# EAGLE board plugV6-Relay-NC-2 (EAGLE 7.5.0)
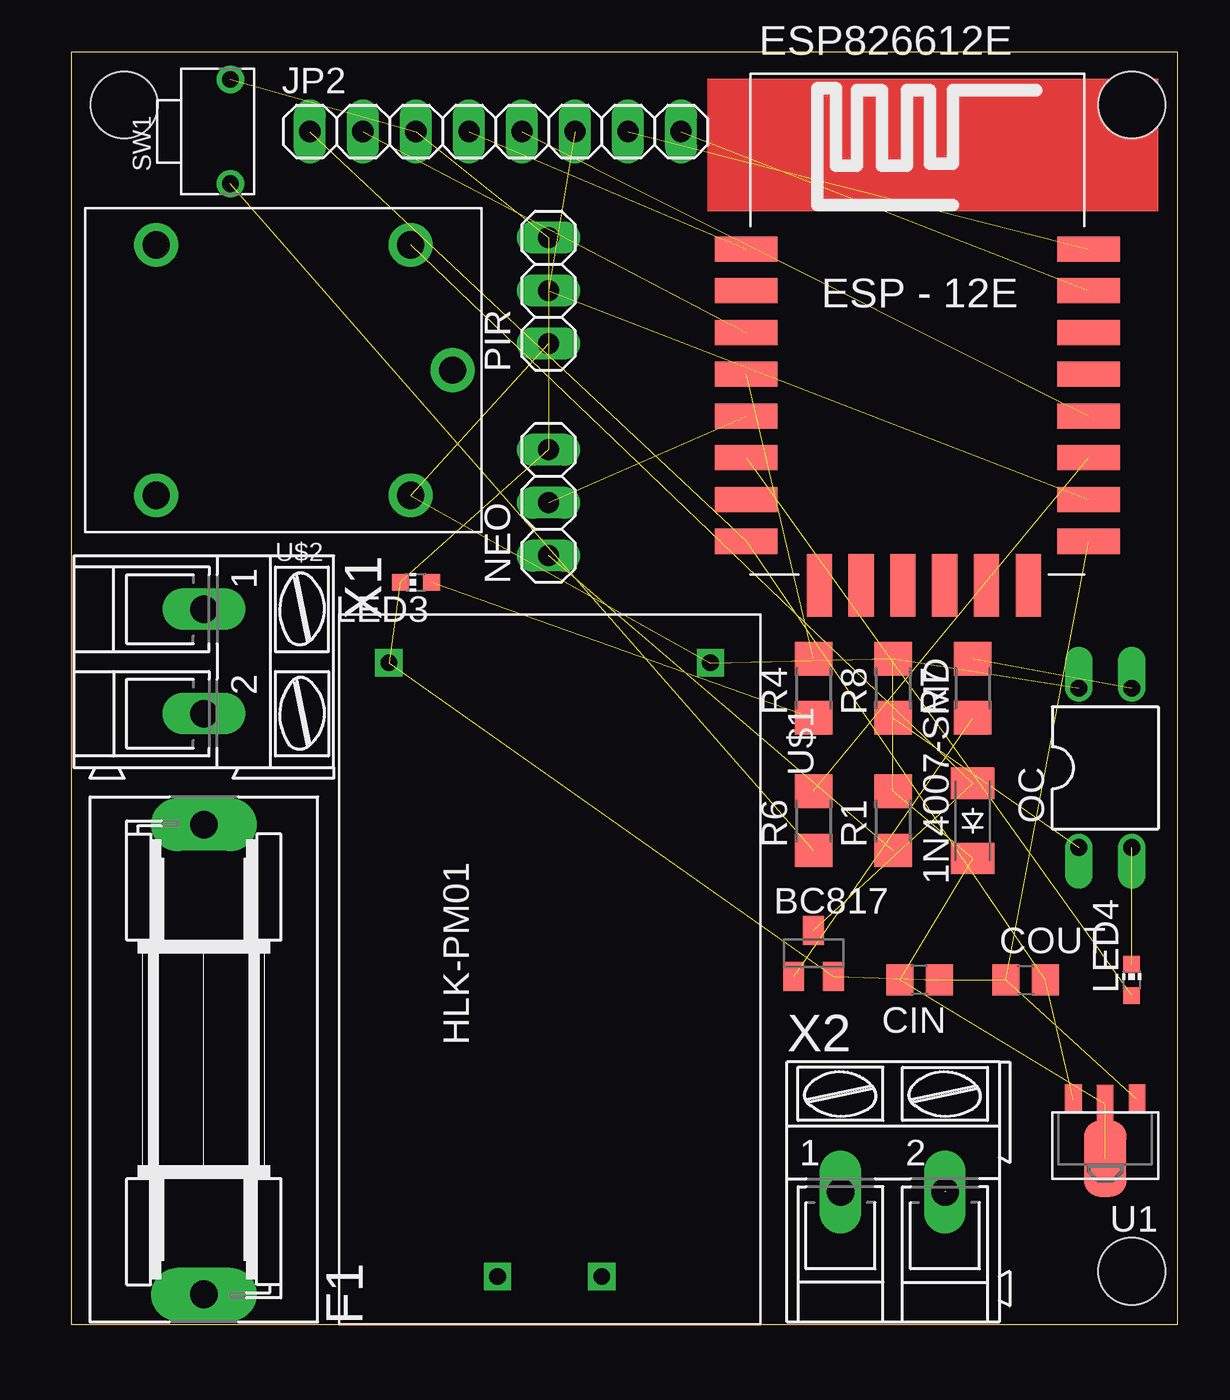
[diagram p0: board, top side]
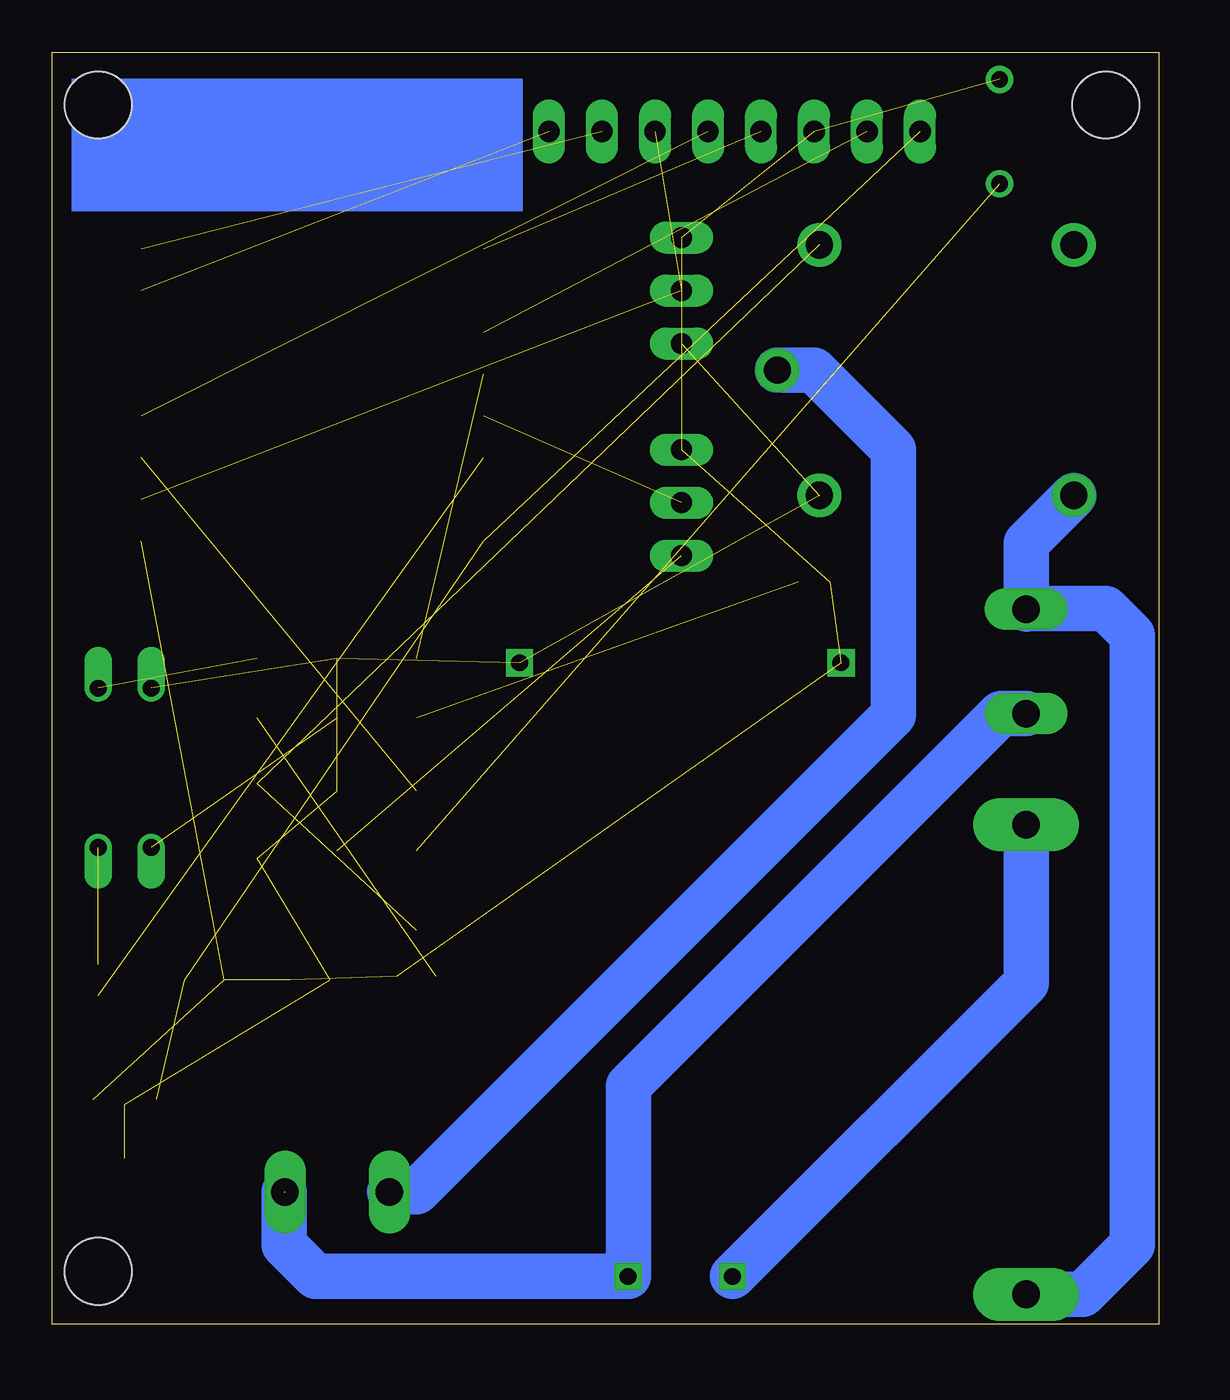
[diagram p1: board, bottom side, seen from below]

Size 53.01 x 60.95 mm. Coordinates in mm from the lower left corner, seen from the top.
Outline: 0,0 53.01,0 53.01,60.95 0,60.95 0,0
Copper layers (1*16): Top 0.035mm / dielectric 1.5mm / Bottom 0.035mm
Design rules "default": minimum track width 10mil, minimum drill 24mil, track to track 8mil, track to pad 8mil, pad to pad 8mil, via to via 8mil, smd to smd 8mil, copper to edge 40mil, drill to drill 8mil, minimum pad ring 10mil, minimum via ring 8mil, stop-mask expansion 4mil, vias tented up to drill 0mil, thermal gap 10mil
Holes 3.2 mm at 50.8,58.42 50.8,2.54 2.54,58.42

## Footprints (pad centres in the part's own frame; a part is rotated, then mirrored left to right if it is on the bottom)
SOD-123_MINI-SMA = smd 1.5 x 2.1: A 1.8,0; C -1.8,0
SOT23-BEC = smd 1 x 1.4: B -0.95,-1.1; C 0,1.1; E 0.95,-1.1
C0805 = smd 1.3 x 1.5: 1 -0.95,0; 2 0.95,0
ESP12E-SMD = smd 3 x 1.2: ADC -8.3,3.8; CH_PD -8.3,1.8; GND 8.1,-8.2; GPIO0 8.1,-2.2; GPIO2 8.1,-4.2; GPIO4 8.1,-0.2; GPIO5 8.1,1.8; GPIO12 -8.3,-4.2; GPIO13 -8.3,-6.2; GPIO14 -8.3,-2.2; GPIO15 8.1,-6.2; GPIO16 -8.3,-0.2; RESET -8.3,5.8; RXD0 8.1,3.8; TXD0 8.1,5.8; VCC -8.3,-8.2 | smd 1.2 x 3: CS0 -4.8,-10.3; GPIO9 -0.8,-10.3; GPIO10 1.2,-10.3; MISO -2.8,-10.3; MOSI 3.2,-10.3; SCLK 5.2,-10.3
SH22,5A = drill 1.321 pad 2.54 long: 1 -11.252,0; 2 11.252,0
1X08 = drill 1.016 long: 1 -8.89,0; 2 -6.35,0; 3 -3.81,0; 4 -1.27,0; 5 1.27,0; 6 3.81,0; 7 6.35,0; 8 8.89,0
CHIP-LED0603 = smd 0.8 x 0.8: A 0,-0.75; C 0,0.75
1X03 = drill 1.016 long: 1 -2.54,0; 2 0,0; 3 2.54,0
DIL04 = drill 0.813 offset: 1 -1.27,-3.81; 2 1.27,-3.81; 3 1.27,3.81; 4 -1.27,3.81
R1206 = smd 1.6 x 1.803: 1 -1.422,0; 2 1.422,0
SW2-5.0-6.0X3.0X4.3MM = drill 0.8 pad 1.27: 1 -2.5,0; 2 2.5,0
SOT89 = smd 0.8 x 1.4: 1 -1.524,-1.905; 3 1.524,-1.905 | smd 0.8 x 1.9: 2 0,-1.651 | smd 2.032 x 3.65: 4 0,0.94
HLK-PM01 = drill 0.8 square: +5V 15.19,-7.76; AC1 -14.21,2.44; AC2 -14.21,-2.56; GND 15.19,7.64
RELAY-SONGLE = drill 1.3 pad 2.1: COM -8.1,0; NC 6.1,6; NO 6.1,-6; V+ -6.1,6; V- -6.1,-6
AK300/2 = drill 1.321 long: 1 -2.515,0; 2 2.489,0

## Placement (x,y rotation side)
1N4007-SMD  CGRM4007-G  [SOD-123_MINI-SMA]  43.18,24.13 90 top
BC817  SOT23  [SOT23-BEC]  35.56,17.78 0 top
CIN  1uF  [C0805]  40.64,16.51 180 top
COUT  1uF  [C0805]  45.72,16.51 0 top
ESP826612E  Value  [ESP12E-SMD]  40.64,45.72 0 top
F1  5A  [SH22,5A]  6.35,12.7 90 top
JP2  Interface PIN  [1X08]  20.32,57.15 0 top
LED3  0805  [CHIP-LED0603]  16.51,35.56 90 top
LED4  0805  [CHIP-LED0603]  50.8,16.51 0 top
NEO  [1X03]  22.86,39.37 90 top
OC  PC817  [DIL04]  49.53,26.67 0 top
PIR  [1X03]  22.86,49.53 90 top
R1  230  [R1206]  39.37,24.13 90 top
R4  230  [R1206]  35.56,30.48 90 top
R6  470  [R1206]  35.56,24.13 90 top
R7  470  [R1206]  43.18,30.48 90 top
R8  1K  [R1206]  39.37,30.48 90 top
SW1  [SW2-5.0-6.0X3.0X4.3MM]  7.62,57.15 90 top
U1  XC6206PR  [SOT89]  49.53,8.89 180 top
U$1  HLK-PM01  [HLK-PM01]  22.86,16.51 90 top
U$2  RELAY-SONGLE  [RELAY-SONGLE]  10.16,45.72 180 top
X1  220V  [AK300/2]  6.35,31.75 270 top
X2  Plug  [AK300/2]  39.37,6.35 0 top

## Library data of the parts
1N4007-SMD = diode
BC817 = transistor-neu-to92
CIN COUT R1 R4 R6-R8 = rcl
ESP826612E = esp8266modules
F1 = fuse; MPN: 0031.7701.11; OC_FARNELL: unknown; OC_NEWARK: 04F1224
JP2 NEO PIR = pinhead
LED3 LED4 = led
OC = optocoupler; MPN: PC817X4J000F; OC_FARNELL: 9707727; OC_NEWARK: 97K7059
SW1 = Seeed-OPL-Switch
U1 = IC
U$1 = HLK-PM01
U$2 = Seeed-OPL-Relay
X1 X2 = con-ptr500; OC_FARNELL: unknown; OC_NEWARK: unknown

## Nets
+5V: 1N4007-SMD.C CIN.2 OC.4 PIR.1 R1.2 R8.2 U1.2 U1.4 U$1.+5V U$2.V+
EN: ESP826612E.CH_PD JP2.2
GND: BC817.E CIN.1 COUT.1 ESP826612E.GND JP2.3 LED3.C NEO.3 PIR.3 SW1.2 U1.1 U$1.GND
GPIO0: ESP826612E.GPIO0 JP2.5
GPIO2: ESP826612E.GPIO2 R6.2
GPIO12: ESP826612E.GPIO12 LED4.A
GPIO13: ESP826612E.GPIO13
GPIO14: ESP826612E.GPIO14 NEO.2
GPIO15: ESP826612E.GPIO15 JP2.6 PIR.2
GPIO16: ESP826612E.GPIO16 R4.2
N$1: F1.1 U$2.NC X1.1
N$2: F1.2 U$1.AC1
N$3: U$1.AC2 X1.2 X2.2
N$4: U$2.COM X2.1
N$5: OC.3 R7.2
N$6: BC817.B R7.1
N$7: R6.1 SW1.1
N$8: LED3.A R4.1
N$9: NEO.1 R1.1
N$13: OC.1 R8.1
N$15: LED4.C OC.2
N$18: 1N4007-SMD.A BC817.C U$2.V-
RST: ESP826612E.RESET JP2.4
RX: ESP826612E.RXD0 JP2.8
TX: ESP826612E.TXD0 JP2.7
V33: COUT.2 ESP826612E.VCC JP2.1 U1.3

## Tracks (layer width: path | path; a pad name or v marks a point on that pad's centre or on a via)
+5V  (9 unrouted)
EN  (1 unrouted)
GND  (10 unrouted)
GPIO0  (1 unrouted)
GPIO2  (1 unrouted)
GPIO12  (1 unrouted)
GPIO14  (1 unrouted)
GPIO15  (2 unrouted)
GPIO16  (1 unrouted)
N$1
  Bottom 2.184: F1.1 3.63,1.45 1.27,3.81 1.27,33.02 2.54,34.29 6.33,34.29 X1.1 6.35,37.43 U$2.NC
N$2
  Bottom 2.184: F1.2 6.35,16.37 U$1.AC1
N$3  (1 unrouted)
  Bottom 2.184: 41.91,6.35 41.91,3.81 40.4,2.3 U$1.AC2 25.4,2.32 25.4,11.43 7.57,29.26 X1.2
N$4
  Bottom 2.184: U$2.COM 16.51,45.72 12.7,41.91 12.7,29.21 35.56,6.35 X2.1
N$5  (1 unrouted)
N$6  (1 unrouted)
N$7  (1 unrouted)
N$8  (1 unrouted)
N$9  (1 unrouted)
N$13  (1 unrouted)
N$15  (1 unrouted)
N$18  (2 unrouted)
RST  (1 unrouted)
RX  (1 unrouted)
TX  (1 unrouted)
V33  (3 unrouted)
(copper drawn outside any net)
  shapes: Bottom area x1, Top area x1